# EAGLE board ignition_board_brd (EAGLE 8.6.0)
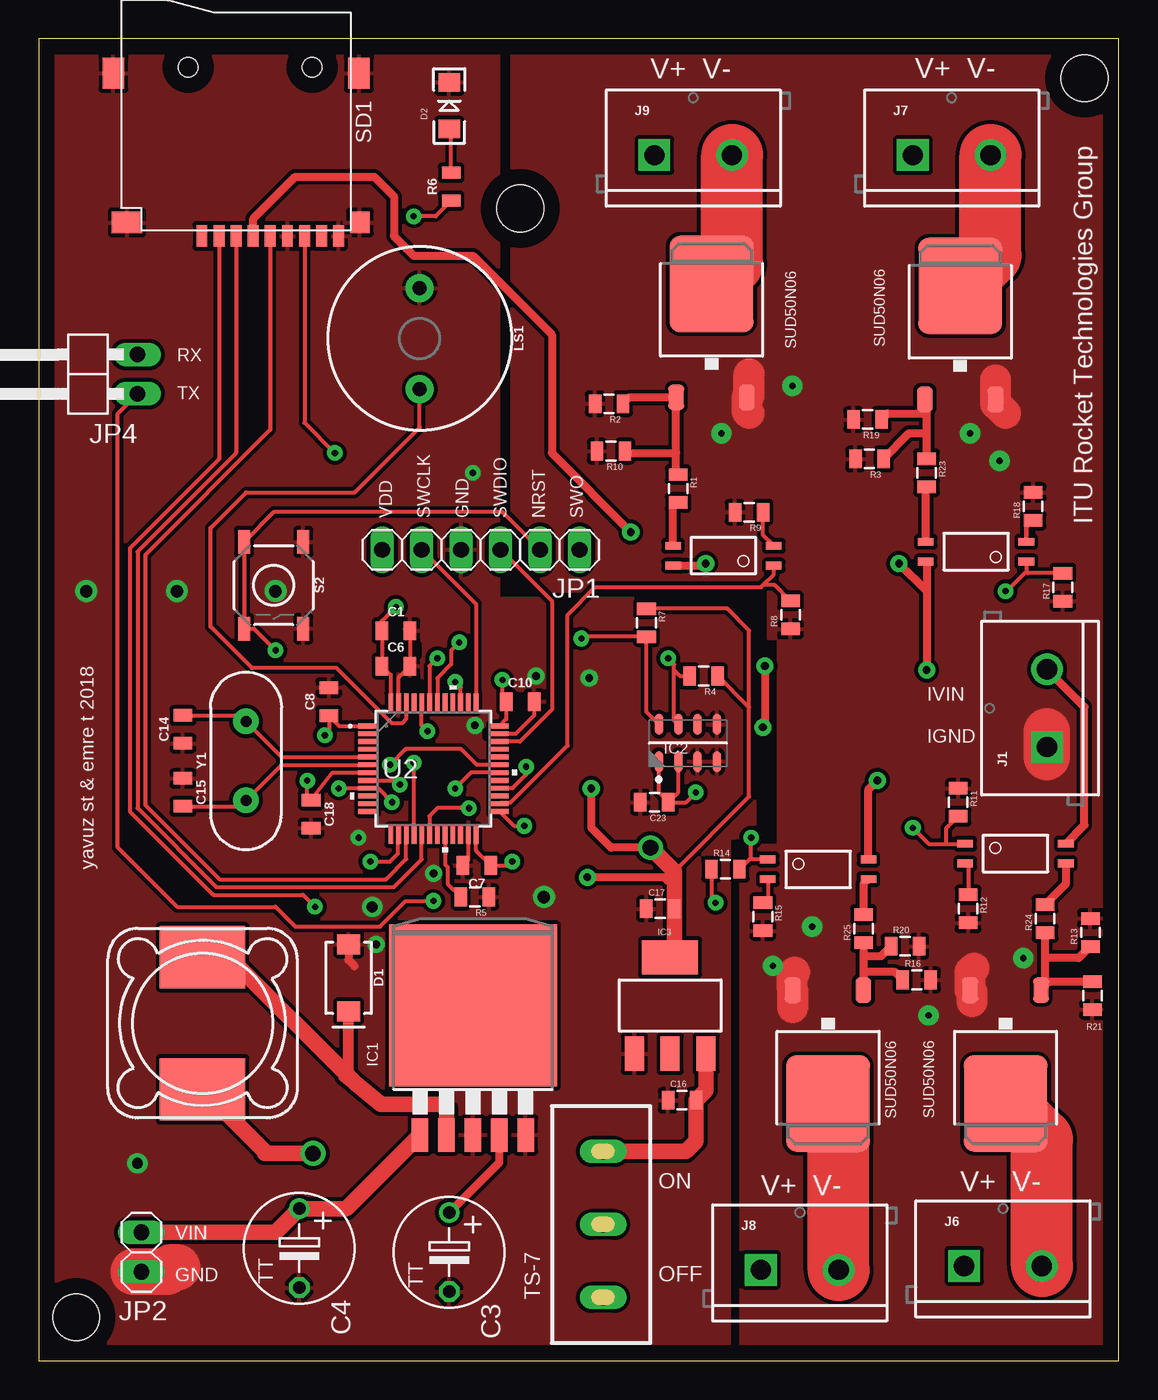
[diagram p0: board, top side]
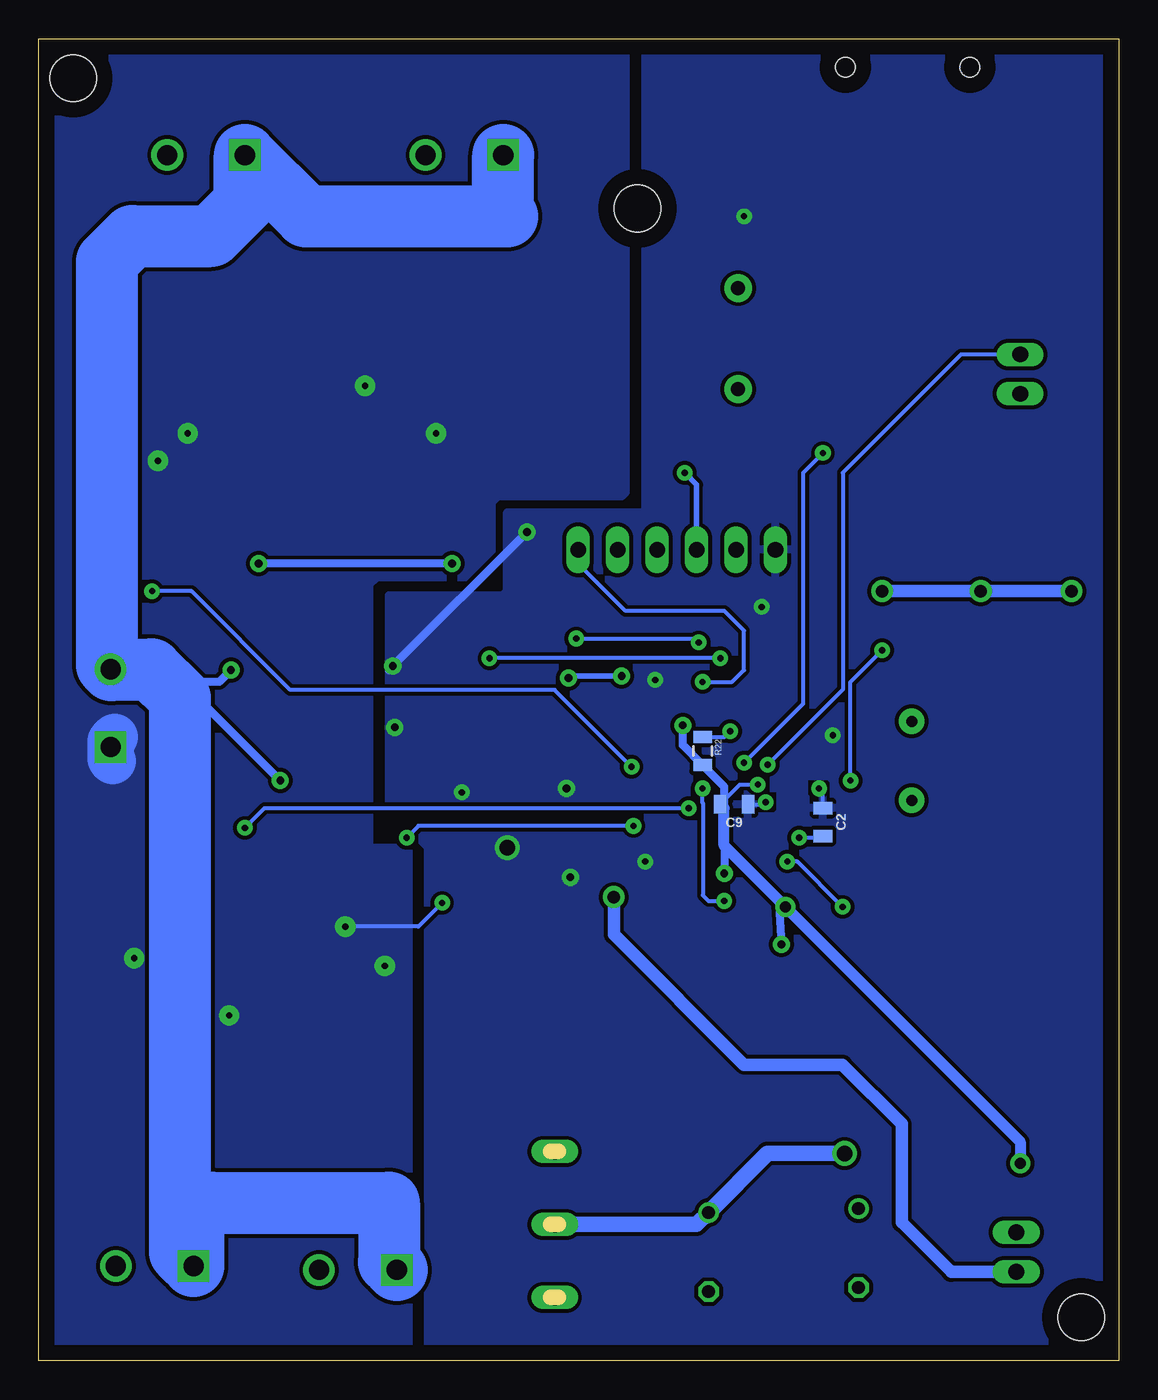
[diagram p1: board, bottom side, seen from below]

Size 69.52 x 85.08 mm. Coordinates in mm from the lower left corner, seen from the top.
Outline: 0,0 69.52,0 69.52,85.08 0,85.08 0,0
Copper layers (1*16): Top 0.035mm / dielectric 1mm / Bottom 0.035mm
Design rules "stm32f1 ignition board *": minimum track width 0.25mm, minimum drill 0.4mm, track to track 0.25mm, track to pad 6mil, pad to pad 6mil, via to via 0.205mm, smd to smd 6mil, copper to edge 40mil, drill to drill 6mil, minimum pad ring 10mil, minimum via ring 0.3mm, stop-mask expansion 4mil, vias tented up to drill 0mil, thermal gap 10mil
Holes 3 mm at 30.99,74.17 67.31,82.55 2.41,2.79
tRestrict: area 23.1,43.3 to 24.4,43.7; area 22.6,44.6 to 24.4,47.2; area 30.6,40.1 to 32.1,42.8; area 28.8,40.1 to 29.2,40.5; area 26.9,32.3 to 27.6,33; area 20.4,36.3 to 23.9,37.6
bRestrict: area 22.1,35.3 to 23.2,36.6; area 18.7,36.3 to 19.9,37.3

## Footprints (pad centres in the part's own frame; a part is rotated, then mirrored left to right if it is on the bottom)
0805 = smd 0.8 x 1.2: 1 -0.9,0; 2 0.9,0
TT5D7 = drill 0.813: + -2.54,0 | drill 0.813 octagon: - 2.54,0
0805@2 = smd 0.8 x 1.2: 1 -0.9,0; 2 0.9,0
SMA-DIODE = smd 1.27 x 1.47: A -2.15,0; C 2.15,0
LED-1206 = smd 1.2 x 1.4: A -1.5,0; C 1.5,0
TO263-5 = smd 1.067 x 2.159: 1 -3.404,-5.791; 2 -1.702,-5.791; 3 0,-5.791; 4 1.702,-5.791; 5 3.404,-5.791 | smd 10.8 x 10.41: 6 0,2.54
SON125P300X500X100-8N = smd 1.35 x 0.55: 1 -1.2,1.875; 2 -1.2,0.625; 3 -1.2,-0.625; 4 -1.2,-1.875; 5 1.2,-1.875; 6 1.2,-0.625; 7 1.2,0.625; 8 1.2,1.875
SOT223 = smd 1.219 x 2.235: 1 -2.311,-3.099; 2 0,-3.099; 3 2.311,-3.099 | smd 3.6 x 2.2: 4 0,3.099
SCREWTERMINAL-5MM-2 = drill 1.3 pad 2.032 square: 1 0,0 | drill 1.3 pad 2.032: 2 5,0
1X06 = drill 1.016 long: 1 -6.35,0; 2 -3.81,0; 3 -1.27,0; 4 1.27,0; 5 3.81,0; 6 6.35,0
1X02 = drill 1.016 long: 1 -1.27,0; 2 1.27,0
1X02/90 = drill 1.016 long: 1 -1.27,-3.81; 2 1.27,-3.81
BUZZER-12MM = drill 0.9 pad 1.778: + 3.25,0; - -3.25,0
MINI-FLAT-4 = smd 1 x 0.5: 1 -3.24,0.635; 2 -3.24,-0.635; 3 3.24,-0.635; 4 3.24,0.635
0805@1 = smd 0.8 x 1.2: 1 -0.9,0; 2 0.9,0
TACTILE_SWITCH_SMD_5.2MM = smd 1.524 x 0.762: 1 -2.794,1.905; 2 2.794,1.905; 3 -2.794,-1.905; 4 2.794,-1.905
TF-PULL = smd 0.7 x 1.4: 1 -2.2,-7.62; 2 -1.1,-7.62; 3 0,-7.62; 4 1.1,-7.62; 5 2.2,-7.62; 6 3.3,-7.62; 7 4.4,-7.62; 8 5.5,-7.62; 9 6.6,-7.62 | smd 1.4 x 2: S1 -7.9,2.85; S2 7.9,2.85 | smd 1.28 x 1.4: S3 7.96,-6.75 | smd 1.95 x 1.4: S4 -7.025,-6.75 | hole 1.25: -3.1,3.25; 4.9,3.25
TO252 = smd 1 x 1.6: 1 -2.28,-6.07; 2 2.28,-6.07 | smd 5.4 x 6.2: 3 0,1.23
TS7 = drill 1 pad 1.5 long: 1 0,0; 2 4.7,0; 3 -4.7,0
LQFP48-7X7MM = smd 1.194 x 0.305: 1 -4.25,2.75; 2 -4.25,2.25; 3 -4.25,1.75; 4 -4.25,1.25; 5 -4.25,0.75; 6 -4.25,0.25; 7 -4.25,-0.25; 8 -4.25,-0.75; 9 -4.25,-1.25; 10 -4.25,-1.75; 11 -4.25,-2.25; 12 -4.25,-2.75; 25 4.25,-2.75; 26 4.25,-2.25; 27 4.25,-1.75; 28 4.25,-1.25; 29 4.25,-0.75; 30 4.25,-0.25; 31 4.25,0.25; 32 4.25,0.75; 33 4.25,1.25; 34 4.25,1.75; 35 4.25,2.25; 36 4.25,2.75 | smd 0.305 x 1.194: 13 -2.75,-4.25; 14 -2.25,-4.25; 15 -1.75,-4.25; 16 -1.25,-4.25; 17 -0.75,-4.25; 18 -0.25,-4.25; 19 0.25,-4.25; 20 0.75,-4.25; 21 1.25,-4.25; 22 1.75,-4.25; 23 2.25,-4.25; 24 2.75,-4.25; 37 2.75,4.25; 38 2.25,4.25; 39 1.75,4.25; 40 1.25,4.25; 41 0.75,4.25; 42 0.25,4.25; 43 -0.25,4.25; 44 -0.75,4.25; 45 -1.25,4.25; 46 -1.75,4.25; 47 -2.25,4.25; 48 -2.75,4.25
MSS1260 = smd 5.5 x 4: P$1 0,4.25; P$2 0,-4.25
HC49US = drill 0.7 pad 1.651: 1 -2.54,0; 2 2.54,0

## Placement (x,y rotation side)
C1  10uF  [0805]  22.99,46.99 0 top
C2  1uF  [0805]  19.05,34.67 270 bottom
C3  220uF  [TT5D7]  26.42,6.99 270 top
C4  680uF  [TT5D7]  16.76,7.24 270 top
C6  100nF  [0805]  22.99,44.7 0 top
C7  100nF  [0805]  28.19,31.88 180 top
C8  100nF  [0805]  18.67,42.42 90 top
C9  100nF  [0805]  24.77,35.81 180 bottom
C10  100nF  [0805]  30.99,42.42 0 top
C14  20pF  [0805]  9.27,40.64 90 top
C15  20pF  [0805]  9.27,36.58 270 top
C16  10uF  [0805@2]  41.4,16.76 0 top
C17  22uF  [0805@2]  40.01,29.08 0 top
C18  100nF  [0805]  17.53,35.18 270 top
C23  100nF  [0805@2]  39.62,35.94 180 top
D1  3A/40V/500mV  [SMA-DIODE]  19.94,24.64 270 top
D2  BLUE  [LED-1206]  26.42,80.77 90 top
IC1  LM2596S  [TO263-5]  27.94,20.32 0 top
IC2  MS5611-01BA03  [SON125P300X500X100-8N]  41.78,39.75 90 top
IC3  [SOT223]  40.64,22.86 0 top
J1  [SCREWTERMINAL-5MM-2]  64.9,39.5 90 top
J6  [SCREWTERMINAL-5MM-2]  59.56,6.1 0 top
J7  [SCREWTERMINAL-5MM-2]  56.26,77.6 0 top
J8  [SCREWTERMINAL-5MM-2]  46.48,5.84 0 top
J9  [SCREWTERMINAL-5MM-2]  39.62,77.6 0 top
JP1  [1X06]  28.45,52.2 180 top
JP2  [1X02]  6.6,6.99 270 top
JP4  [1X02/90]  2.54,63.5 90 top
LS1  BUZZER-PTH  [BUZZER-12MM]  24.51,65.79 270 top
OK1  TLP283  [MINI-FLAT-4]  44.07,51.82 180 top
OK2  TLP283  [MINI-FLAT-4]  50.16,31.62 0 top
OK3  TLP283  [MINI-FLAT-4]  60.33,52.07 180 top
OK5  TLP283  [MINI-FLAT-4]  62.87,32.64 0 top
R1  10  [0805]  41.15,56.13 270 top
R2  10K  [0805]  36.7,61.59 180 top
R3  10K  [0805]  53.47,58.04 180 top
R4  4.7K  [0805]  42.8,44.07 180 top
R5  10K  [0805]  28.07,29.84 180 top
R6  560  [0805@1]  26.54,75.56 90 top
R7  4.7K  [0805]  39.12,47.5 270 top
R8  10K  [0805]  48.39,48.01 90 top
R9  180  [0805]  45.72,54.61 180 top
R10  10K  [0805]  36.83,58.55 180 top
R11  10K  [0805]  59.18,35.94 270 top
R12  180  [0805]  59.82,29.08 270 top
R13  10K  [0805]  67.69,27.56 90 top
R14  10K  [0805]  44.2,31.62 0 top
R15  180  [0805]  46.61,28.57 270 top
R16  10K  [0805]  56.52,24.51 0 top
R17  10K  [0805]  65.91,49.78 90 top
R18  180  [0805]  64.01,54.99 90 top
R19  10K  [0805]  53.34,60.58 180 top
R20  10K  [0805]  55.75,26.67 0 top
R21  10K  [0805]  67.82,23.5 270 top
R22  10K  [0805]  26.8,39.24 270 bottom
R23  10  [0805]  57.15,57.15 270 top
R24  10  [0805]  64.77,28.45 90 top
R25  10  [0805]  53.09,27.81 90 top
S2  [TACTILE_SWITCH_SMD_5.2MM]  15.11,49.91 270 top
SD1  TF-HOLDER  [TF-PULL]  12.7,80.01 0 top
SUD50N06  IRFR3709Z-MOSFET  [TO252]  50.8,17.78 180 top
TS-7  TS-7  [TS7]  36.32,8.76 90 top
U2  [LQFP48-7X7MM]  25.4,38.1 0 top
U$1  33uH  [MSS1260]  10.54,21.72 180 top
U$3  IRFR3709Z-MOSFET  [TO252]  62.23,17.78 180 top
U$5  IRFR3709Z-MOSFET  [TO252]  43.31,68.07 0 top
U$7  IRFR3709Z-MOSFET  [TO252]  59.31,67.94 0 top
Y1  [HC49US]  13.34,38.61 90 top

## Library data of the parts
C1 C2 C6-C10 C14 C15 C18 = SparkFun-Capacitors; PROD_ID: CAP-11330
C3 C4 = resistor
C16 C17 C23 = SparkFun-Capacitors
D1 = SparkFun-DiscreteSemi; PROD_ID: DIO-09886
D2 = SparkFun-LED; PROD_ID: DIO-09911
IC1 = national-semiconductor; MF: NATIONAL SEMICONDUCTOR; MPN: LM2596S-ADJ/NOPB; OC_FARNELL: 9494367; OC_NEWARK: 41K3842
IC2 = Measurement-Specialties
IC3 = SparkFun
J1 J6-J9 = SparkFun-Connectors; SF_SKU: PRT-08432
JP1 JP2 JP4 = pinhead
LS1 = SparkFun-Electromechanical; PROD_ID: COMP-08253; SF_SKU: COM-07950
OK1-OK3 OK5 = optocoupler; OC_FARNELL: unknown; OC_NEWARK: unknown
R1-R5 R7-R25 = SparkFun-Resistors
R6 = SparkFun-Resistors; PROD_ID: RES-11622
S2 = SparkFun-Switches; PROD_ID: SWCH-08247; SF_SKU: COM-08720
SD1 = sd-mmc
SUD50N06 U$3 U$5 U$7 = Fuzzy
TS-7 = ts-7-switch
U2 = stm32f103cxt2; MANUFACTURER_PART_NUMBER: stm32f103cxt2; VENDOR: STMicroelectronics
U$1 = inductor-coilcraft
Y1 = SparkFun-Clocks

## Nets
5V: C16.2 IC3.3 TS-7.2
5VS: C3.+ IC1.4 TS-7.1 U$1.P$1
11.1V: J1.2 J6.1 J7.1 J8.1 J9.1 OK1.4 OK2.4 OK3.4 OK5.4
CS: SD1.2 U2.14
G2: R1.1 R2.1 R10.1 U$5.1
G3: R13.1 R21.1 R24.1 U$3.1
G4: R3.1 R19.1 R23.1 U$7.1
G5: R16.1 R20.1 R25.1 SUD50N06.1
GND: C1.2 C2.2 C3.- C4.- C6.2 C7.2 C8.2 C9.2 C10.2 C14.1 C15.1 C16.1 C17.1 C18.2 C23.2 D1.A D2.C IC1.3 IC1.5 IC2.3 IC2.4 IC2.5 IC3.1 JP1.4 JP2.2 LS1.- R5.1 R22.2 S2.1 S2.2 SD1.6 SD1.9 SD1.S1 SD1.S2 SD1.S3 SD1.S4 U2.8 U2.23 U2.35 U2.47
IGND: J1.1 R2.2 R3.2 R8.1 R9.2 R10.2 R11.1 R12.2 R13.2 R14.1 R15.2 R16.2 R17.1 R18.2 R19.2 R20.2 R21.2 SUD50N06.2 U$3.2 U$5.2 U$7.2
MISO: SD1.7 U2.16
MOSI: SD1.3 U2.17
N$2: C15.2 U2.6 Y1.1
N$3: C14.2 U2.5 Y1.2
N$8: R22.1 U2.44
N$11: D1.C IC1.2 U$1.P$2
N$12: OK1.3 R1.2
N$13: R5.2 U2.20
N$14: D2.A R6.2
N$15: OK2.3 R25.2
N$17: J7.2 U$7.3
N$18: J9.2 U$5.3
N$19: J6.2 U$3.3
N$21: OK3.3 R23.2
N$22: OK5.2 R12.1
N$23: OK5.3 R24.2
N$24: J8.2 SUD50N06.3
N$25: OK2.2 R15.1
N$27: OK1.2 R9.1
N$31: OK3.2 R18.1
NRST: C18.1 JP1.2 S2.3 S2.4 U2.7
PA9: JP4.1 U2.30
PA10: JP4.2 U2.31
PA13: JP1.3 U2.34
PA14: JP1.5 U2.37
PB0: OK5.1 R11.2 U2.18
PB3: JP1.1 U2.39
PB9: LS1.+ U2.46
PB12: OK2.1 R14.2 U2.25
PB13: OK1.1 R8.2 U2.26
PB15: OK3.1 R17.2 U2.28
SCK: SD1.5 U2.15
SCL: IC2.8 R7.2 U2.42
SDA: IC2.7 R4.2 U2.43
VDD: C1.1 C2.1 C6.1 C7.1 C8.1 C9.1 C10.1 C17.2 C23.1 IC2.1 IC2.2 IC3.4 JP1.6 R4.1 R6.1 R7.1 SD1.4 U2.1 U2.9 U2.24 U2.36 U2.48
VIN: C4.+ IC1.1 JP2.1

## Tracks (layer width: path | path; a pad name or v marks a point on that pad's centre or on a via)
5V
  Top 1: TS-7.2 41.66,13.46 42.3,14.11 C16.2 42.95,17.41 IC3.3
5VS  (via drill 1)
  Top 0.5: C3.+ 29.64,12.75 IC1.4
  Top 1: 14.55,13.34 14.67,13.34 | v17.65,13.34 15.24,13.34 14.67,13.34 | 14.67,13.34 U$1.P$1
  Bottom 1: v17.65,13.34 22.61,13.34 C3.+ 27.18,8.76 TS-7.1
11.1V  (via drill 0.5)
  Top 0.5: OK3.4 57.15,51.37 57.15,49.53 | 57.15,49.53 v57.15,44.45 | OK1.4 42.8,51.18 v42.93,51.31 | 57.15,49.53 v55.37,51.31 | OK5.4 67.31,34.48 67.31,42.08 J1.2 | OK2.4 53.41,36.77 v53.98,37.34
  Bottom 0.5: v42.93,51.31 v55.37,51.31 | v57.15,44.45 57.91,43.69 60.33,43.69 | v53.98,37.34 60.33,43.69 | 64.85,44.45 61.09,44.45 60.33,43.69
  Bottom 4: J6.1 59.56,9.02 58.42,10.16 46.99,10.16 46.99,6.35 J8.1 | J9.1 39.62,73.91 39.37,73.66 52.32,73.66 J7.1 56.26,74.55 58.42,72.39 63.5,72.39 65.15,70.74 65.15,44.75 J1.2 | J6.1 60.2,6.73 | 64.85,44.45 J1.2 | J1.2 62.28,44.5 60.45,42.67 60.45,6.99 J6.1
CS  (via drill 0.4)
  Top 0.25: SD1.2 11.6,58.03 5.85,52.28 5.85,35.35 11.22,29.98 17.01,29.98 v17.78,29.21 | v21.34,32.13 22.61,32.13 23.11,32.64 23.11,33.81 U2.14
  Bottom 0.25: v17.78,29.21 20.7,32.13 v21.34,32.13
G2
  Top 0.5: R2.1 38.01,62 U$5.1 41.03,58.42 | R1.1 41.03,57.16 41.03,58.42 | R10.1 37.86,58.42 41.03,58.42
G3
  Top 0.5: R24.1 64.77,25.91 | 64.77,25.91 64.77,24.13 | 64.77,24.13 64.77,24.11 U$3.1 | R13.1 66.94,25.91 64.77,25.91 | R21.1 65.03,24.39 64.77,24.13
G4
  Top 0.5: R23.1 57.15,59.69 | 57.15,59.69 57.15,60.96 | 57.15,60.96 57.15,61.75 U$7.1 | R19.1 54.62,60.96 57.15,60.96 | R3.1 56.02,59.69 57.15,59.69
G5
  Top 0.5: R25.1 53.09,26.04 | 53.09,26.04 53.09,25.02 | 53.09,25.02 SUD50N06.1 | R20.1 54.22,26.04 53.09,26.04 | R16.1 55.11,25.02 53.09,25.02
GND  (via drill 0.4, 0.5, 0.7, 0.8)
  Top 0.25: C7.2 27.65,32.23 U2.23 | C1.2 C6.2 23.15,43.97 U2.47 | C10.2 31.89,41.54 30.7,40.35 U2.35 | U2.8 22.98,37.35 v23.24,37.08
  Top 0.35: 31.89,43.95 v32,44.07
  Top 0.5: D1.A 19.94,25.78 20.32,25.4
  Top 3: 8.89,6 8.54,6 8.26,5.71 JP2.2 6.1,5.71
  Bottom 0.25: C2.2 19.17,33.66 v20.57,33.66 | 25.4,35.55 25.41,35.55 C9.2 24.39,37.08 v23.24,37.08
  Bottom 0.35: JP1.4 27.18,56.39 v27.94,57.15 | v32,44.07 35.31,44.07 v35.43,43.94
  Bottom 0.5: 25.4,35.55 v25.4,31.37 | v28.07,40.89 28.07,39.61 R22.2 25.41,36.95 25.41,35.55 | v21.46,29.21 21.84,28.83 v21.72,26.8
  Bottom 0.7: 25.41,35.55 25.41,33.15 v21.46,29.21 6.35,14.1 v6.35,12.7
  Bottom 0.8: v15.24,49.53 v8.89,49.53 v3.05,49.53 2.92,49.53 | JP2.2 10.79,5.71 13.97,8.89 13.97,15.24 17.78,19.05 24.13,19.05 32.51,27.43 v32.51,29.84
  pour Top (isolate 0.25): -2.03,-0.13 44.45,0 44.45,33.66 46.1,33.78 46.1,45.72 46.48,45.59 46.48,49.02 29.72,49.02 29.59,48.9 29.59,84.96 -2.03,84.84
IGND  (via drill 0.4, 0.4 pad 1.3)
  Top 0.25: R14.1 43.3,29.73 v43.56,29.46
  Top 2: 45.72,60.96 45.59,61.09 U$5.2 45.72,62.13 45.72,63.5 | 62.23,60.96 61.59,61.6 U$7.2 61.59,63.11 61.59,63.12 | 60.2,25.27 59.95,25.02 U$3.2 60.07,23.73 60.07,23.11 | 48.64,25.02 48.52,24.9 SUD50N06.2 48.51,22.73
  Top 3: 64.9,40.51 J1.1 64.9,38.86
  Bottom 0.25: v43.56,29.46 45.09,27.94 v49.78,27.94
  Bottom 3: 64.64,40.13 64.9,39.88 J1.1 64.9,38.73 64.77,38.61
  other vias: 48.51,62.74 61.85,57.91 59.94,59.69 43.94,59.69 47.24,25.4 57.28,22.23 63.37,25.91
  pour Top (isolate 0.2): 45.21,0 45.21,33.02 45.34,33.15 47.62,33.15 47.62,46.48 46.99,46.48 46.99,49.53 30.48,49.53 30.48,85.09 69.47,85.09 69.6,84.96 69.6,0
  pour Bottom: 31.75,85.09 31.75,55.88 32,55.63 40.01,55.63 40.39,55.24 40.39,50.42 47.75,50.42 48.26,49.91 48.26,33.02 45.72,33.02 45.72,-1.27 71.12,-1.27 71.12,85.09
MISO  (via drill 0.4)
  Top 0.25: SD1.7 17.1,60.37 v19.05,58.42 | U2.16 24.15,38.46 v24.13,38.48
  Bottom 0.25: v24.13,38.48 20.32,42.29 20.32,57.15 v19.05,58.42
MOSI
  Top 0.25: SD1.3 12.7,58.42 6.35,52.07 6.35,35.56 11.43,30.48 22.86,30.48 24.65,32.27 U2.17
N$2
  Top 0.25: U2.6 15.62,38.35 Y1.1 12.94,35.68 C15.2
N$3
  Top 0.25: U2.5 15.63,38.85 Y1.2 12.94,41.54 C14.2
N$8  (via drill 0.4)
  Top 0.25: v25.02,40.51 24.65,40.88 U2.44
  Bottom 0.25: R22.1 25.39,40.14 v25.02,40.51
N$11
  Top 0.5: 19.76,18.36 19.94,18.54
  Top 0.7: 19.94,18.54 D1.C
  Top 1: IC1.2 26.24,16.18 25.91,16.51 22.03,16.51 20.38,17.85 | 20.38,17.85 19.76,18.36 | 20.38,17.85 12.26,25.97 U$1.P$2
N$12
  Top 0.5: OK1.3 40.83,54.91 R1.2
N$13
  Top 0.25: U2.20 26.15,31.93 26.32,31.75 26.32,30.69 R5.2
N$14
  Top 0.25: R6.2 26.54,79.14 D2.A
N$15
  Top 0.5: OK2.3 53.09,30.67 R25.2
N$17
  Top 4: U$7.3 61.26,71.13 J7.2
N$18
  Top 4: U$5.3 44.62,70.62 J9.2
N$19
  Top 4: J6.2 64.56,14.22 U$3.3
N$21
  Top 0.35: 57.09,56.19 R23.2
  Top 0.5: OK3.3 57.09,56.19
N$22
  Top 0.25: OK5.2 59.82,31.81 R12.1
N$23
  Top 0.5: OK5.3 66.11,30.68 R24.2
N$24
  Top 4: J8.2 51.48,15.87 SUD50N06.3
N$25
  Top 0.25: OK2.2 46.92,29.79 R15.1
N$27
  Top 0.25: OK1.2 46.62,53.14 R9.1
N$31
  Top 0.3: OK3.2 63.56,53.65 R18.1
NRST  (via drill 0.4)
  Top 0.25: U2.7 18.92,37.85 C18.1 17.27,36.33 v17.27,37.34 | v15.24,45.72 13.84,47.12 S2.4 S2.3 15.11,54.61 29.84,54.61 JP1.2
  Bottom 0.25: v17.27,37.34 17.27,43.69 v15.24,45.72
PA9  (via drill 0.4)
  Top 0.25: U2.30 27.82,37.85 v26.8,36.83 | v25.4,29.59 23.62,29.59 21.97,27.94 16.51,27.94 15.24,29.21 8.89,29.21 5.08,33.02 5.08,60.96 JP4.1
  Bottom 0.25: v26.8,36.83 26.8,35.9 26.78,35.88 26.78,29.96 26.42,29.59 v25.4,29.59
PA10  (via drill 0.4)
  Top 0.25: U2.31 28.2,38.35 27.18,39.37 23.62,39.37 v22.61,38.35
  Bottom 0.25: v22.61,38.35 17.77,43.19 17.77,57.16 10.16,64.77 JP4.2
PA13
  Top 0.25: JP1.3 33.02,48.9 33.02,41.91 30.96,39.85 U2.34
PA14
  Top 0.25: JP1.5 28.15,48.69 U2.37
PB0  (via drill 0.4)
  Top 0.25: v27.69,35.56 25.65,35.56 25.15,35.06 U2.18 | v56.26,34.29 57.28,33.27 58.42,33.27 | 58.42,33.27 OK5.1 | 58.42,33.27 58.42,34.28 R11.2
  Bottom 0.25: v56.26,34.29 54.99,35.56 v27.69,35.56
PB3  (via drill 0.4)
  Top 0.25: U2.39 27.15,43.34 v26.8,43.69
  Bottom 0.25: v26.8,43.69 24.89,43.69 24.13,44.45 24.13,46.99 25.4,48.26 31.75,48.26 34.8,51.31 JP1.1
PB9
  Top 0.25: U2.46 23.65,41.3 23.37,41.02 22.73,41.02 19.18,44.58 13.72,44.58 11.05,47.24 11.05,53.59 13.34,55.88 20.32,55.88 24.51,60.07 LS1.+
PB12  (via drill 0.4)
  Top 0.25: OK2.1 45.73,32.26 | 45.73,32.26 R14.2 | U2.25 30.58,34.42 v31.24,34.42 | 45.73,32.26 45.85,32.37 v45.85,33.66
  Bottom 0.25: v45.85,33.66 45.09,34.42 v31.24,34.42
PB13
  Top 0.25: U2.26 29.72,35.92 30.36,35.92 34.04,39.59 34.04,48.01 35.81,49.78 46.48,49.78 46.61,49.91 | 46.61,49.91 47.31,50.61 OK1.1 | R8.2 47.38,49.91 46.61,49.91
PB15  (via drill 0.4)
  Top 0.25: U2.28 30.5,36.85 31.37,37.72 v31.37,38.23 | OK3.1 63.56,50.8 | R17.2 63.68,50.68 63.56,50.8 | 63.56,50.8 62.3,49.53 v62.23,49.53
  Bottom 0.25: v31.37,38.23 36.32,43.18 53.34,43.18 59.69,49.53 v62.23,49.53
SCK
  Top 0.25: SD1.5 14.9,59.91 6.85,51.86 6.85,35.77 11.64,30.98 22.35,30.98 23.65,32.28 U2.15
SCL  (via drill 0.4)
  Top 0.25: 39.47,46.6 R7.2 | R7.2 35.04,46.6 v34.92,46.48 | v27.05,46.23 26.54,45.72 26.54,44.83 25.65,43.94 U2.42 | IC2.8 39.12,41.74 R7.2
  Bottom 0.25: v34.92,46.48 27.3,46.48 v27.05,46.23
SDA  (via drill 0.4)
  Top 0.25: v25.65,45.21 25.15,44.71 U2.43 | IC2.7 40.89,41.22 40.89,44.45 | 40.89,44.45 40.89,44.83 v40.51,45.21 | 40.89,44.45 41.27,44.07 R4.2
  Bottom 0.25: v25.65,45.21 v40.51,45.21
VDD  (via drill 0.4, 0.5, 1)
  Top 0.25: v19.3,36.83 19.32,36.85 U2.9 21.82,36.85 v22.73,35.94 | U2.24 28.15,32.82 C7.1 30.23,31.88 v30.48,32.13 | C23.1 39.91,36.56 IC2.1 | C23.1 41.16,36.58 IC2.2 | U2.48 22.65,44.14 C6.1 C1.1 22.09,47.61 v22.99,48.51 | U2.1 19.34,40.85 C8.1 18.67,40.51 v18.41,40.26 | C23.1 41.66,35.94 v42.29,36.58 | R6.1 25.54,73.66 v24.13,73.66 | U2.36 30.09,41.29 C10.1 29.84,42.66 v29.84,43.81 | 40.91,31.48 45.72,36.3 45.72,42.05 | 45.72,42.05 R4.1 | 45.72,42.05 45.72,46.99 44.31,48.4 R7.1
  Top 0.5: SD1.4 13.8,73.49 16.51,76.2 21.59,76.2 22.86,74.93 22.86,72.39 24.13,71.12 27.94,71.12 33.02,66.04 33.02,58.42 v38.1,53.34 | 40.91,30.48 40.27,31.11 v35.31,31.11 | v39.37,33.02 36.83,33.02 35.56,34.29 v35.56,36.83 | v46.74,44.7 46.74,40.89 v46.61,40.77
  Top 1: IC3.4 40.91,26.22 C17.2 40.91,30.48 40.91,31.48 v39.37,33.02
  Bottom 0.25: C2.1 19.05,36.58 v19.3,36.83 | 23.86,35.83 C9.1 22.86,35.81 v22.73,35.94
  Bottom 0.5: v38.1,53.34 v46.74,44.7 46.99,44.45
  pour Bottom: -1.27,86.36 -1.27,0 44.45,0 44.45,31.75 44.45,33.02 45.72,34.29 46.99,34.29 46.99,49.28 39.62,49.28 39.37,49.53 39.37,54.61 30.48,54.61 30.48,86.36
VIN
  Top 1: JP2.1 15.24,8.26 C4.+ 19.79,9.78 IC1.1

## Text on the board
tNames: V+ V- | V+ V- | SUD50N06 | SUD50N06 | RX / / TX | VDD / / SWCLK / / GND / / SWDIO / / NRST / / SWO | ITU Rocket Technologies Group | IVIN / / IGND | yavuz st & emre t 2018 | SUD50N06 | V+ V- | V+ V- | VIN / / GND | ON / / / / OFF